# Allegro board DESIGN1 (1) (1).brd
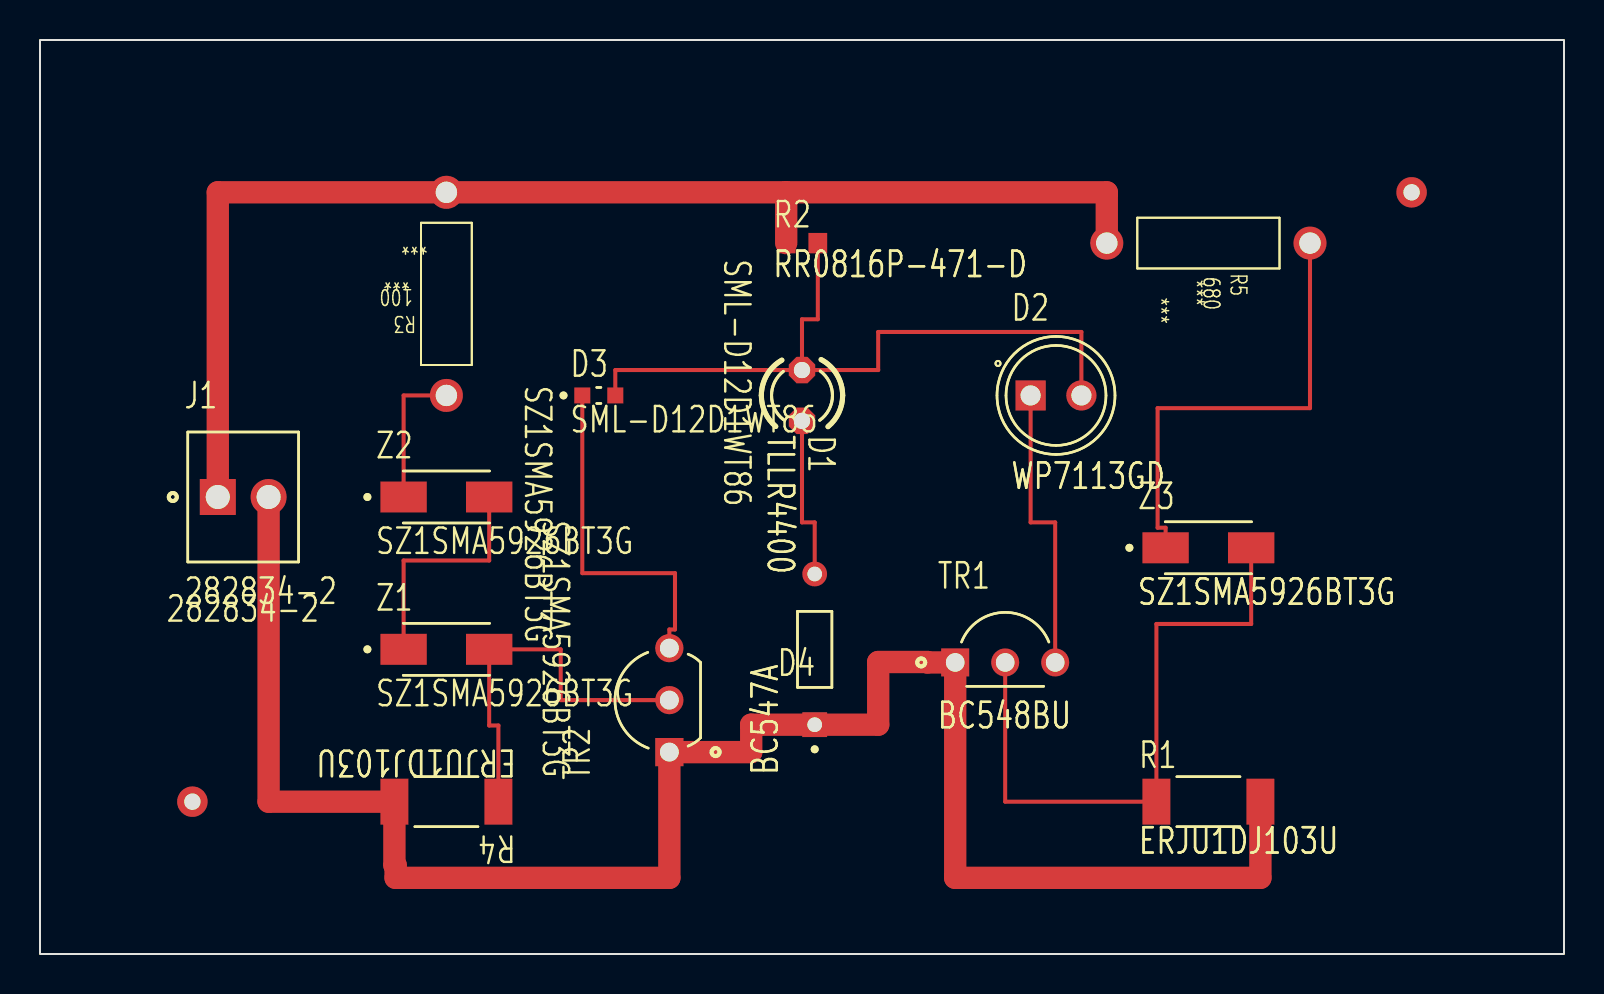
[diagram p0: board, top side]
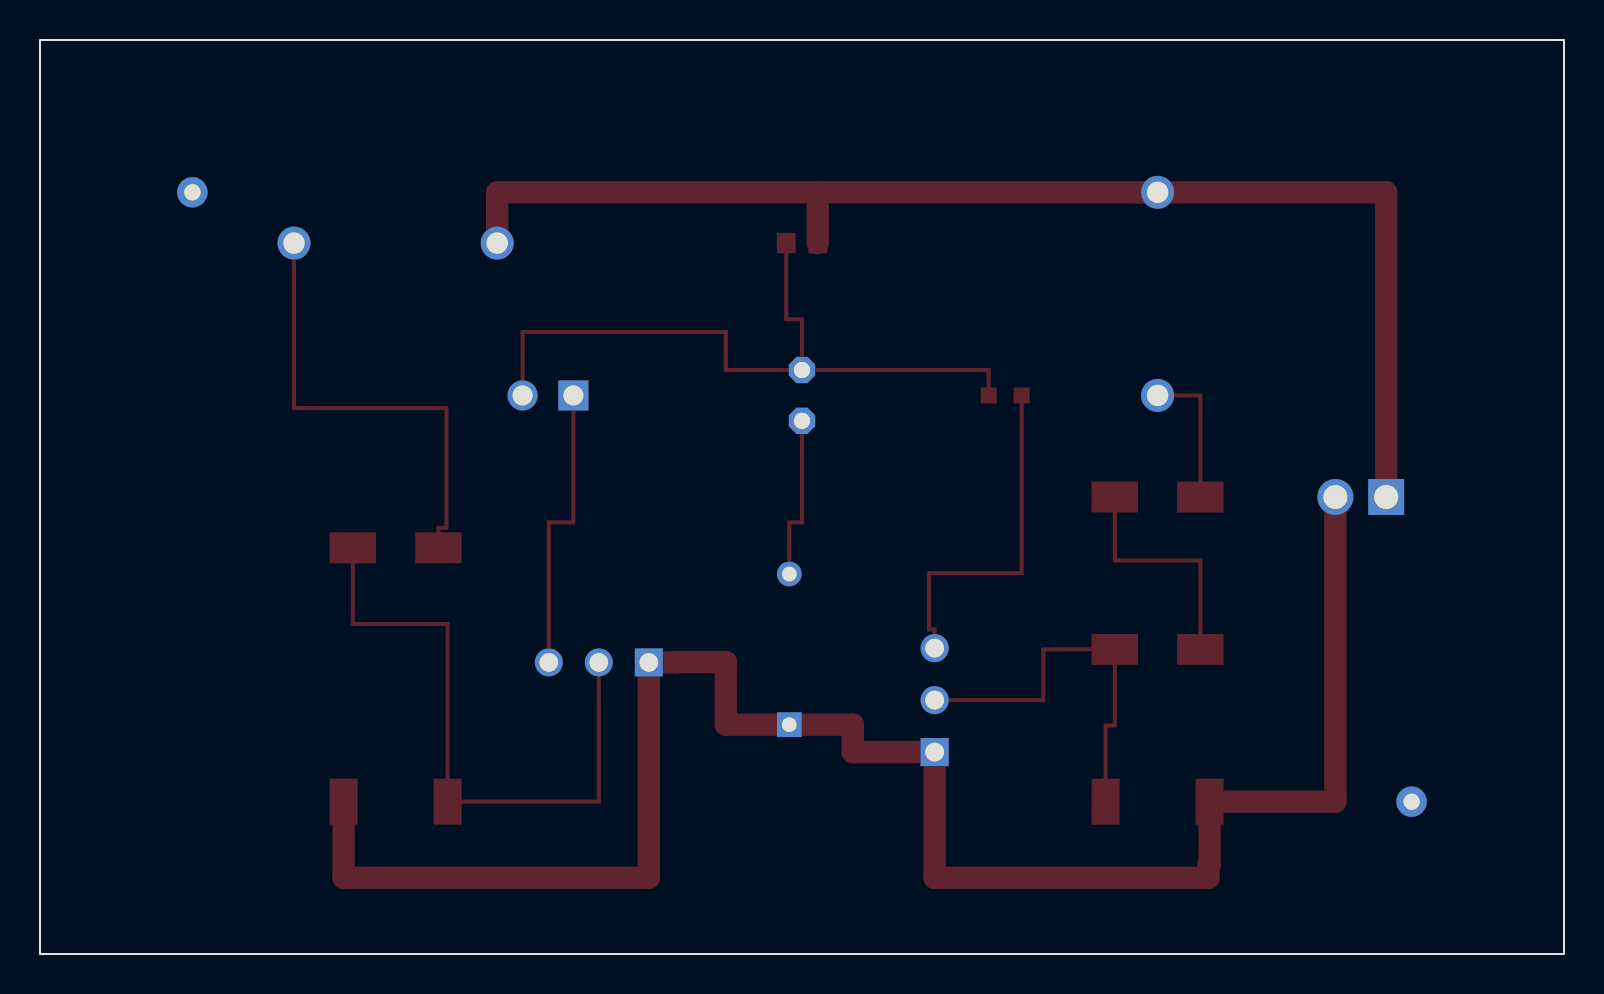
[diagram p1: board, bottom side, seen from below]

Outline 76.2 x 45.72 mm; copper layers: TOP, BOTTOM. Coordinates in mm from the lower left corner of the outline.
Outline path: rectangle 0,0 76.2,45.72

## Design rules (mm)
nets with their own width: min track width 0.203; nets N00389 N00469 N00542 N00555 N01168 N02381 N02623 N02869 N024491
nets with their own width: min track width 1.118; nets IESIRE VCC

## Placement (name value [footprint] x y rotation side)
D1  LED  [LED3MM]  38.1 27.94 270 top
D2  WP7113GD  [LED_WP7113GD]  50.8 27.94 0 top
D3  SML-D12D1WT86  [LED_SML-D12D1WT86]  27.94 27.94 0 top
D4  1N916A  [DIOAD753W49L380D172B]  38.74 15.24 90 top
J1  CON2  [TE_282834-2]  10.16 22.86 0 top
NOREF  -  [unnamed]  68.58 38.1 0 top
NOREF#2  -  [unnamed]  7.62 7.62 0 top
R1  10K  [RES_ERJU1DJ103U]  58.42 7.62 0 top
R2  470  [RESC1608X50N]  38.1 35.56 0 top
R3  100  [RES400]  20.32 38.1 180 top
R4  10K  [RES_ERJU1DJ103U]  20.32 7.62 180 top
R5  680  [RES400]  53.34 35.56 270 top
TR1  BC548  [TO92250P510H770-3]  48.26 15.24 0 top
TR2  BC547  [TO92260P520H877-3]  30.48 12.7 90 top
Z1  SZ1SMA5926BT3G  [DIOM5226X220N]  20.32 15.24 0 top
Z2  SZ1SMA5926BT3G  [DIOM5226X220N]  20.32 22.86 0 top
Z3  SZ1SMA5926BT3G  [DIOM5226X220N]  58.42 20.32 0 top

## Library data of the parts
D1 = LED
D2 = WP7113GD_0
D3 = SML-D12D1WT86
D4 = 1N916A
J1 = CON2
R1 R2 R4 = RESISTOR
R3 R5 = RESISTOR: Tolerance: ***; User Part Number: ***
TR1 = BC548
TR2 = BC547
Z1-Z3 = SZ1SMA5926BT3G

## Footprints (pads in the part's own frame, mm; a bottom-side part is the same pattern mirrored in y, then rotated)
DIOAD753W49L380D172B
  round 1.238 hole 0.73: A(3.769,0)
  rect 1.238x1.238 hole 0.73: K(-3.769,0)
DIOM5226X220N
  rect 2.32x1.55 smd: A(2.14,0) C(-2.14,0)
LED3MM
  rrect 1.321x1.321 hole 0.813: A(-1.27,0) K(1.27,0)
LED_SML-D12D1WT86
  rect 0.8x0.8 smd: A(0.825,0) C(-0.825,0)
LED_WP7113GD
  round 1.508 hole 1: A(1.27,0)
  rect 1.508x1.508 hole 1: C(-1.27,0)
RES400
  round 1.651 hole 1.067: 1(0,0) 2(0,10.16)
RES_ERJU1DJ103U
  rect 1.4x2.3 smd: 1(-2.6,0) 2(2.6,0)
RESC1608X50N
  rect 0.94x1.02 smd: 1(-0.79,0) 2(0.79,0)
TE_282834-2
  rect 1.8x1.8 hole 1.2: 1(-1.27,0)
  round 1.8 hole 1.2: 2(1.27,0)
TO92250P510H770-3
  rect 1.4x1.4 hole 0.93: 1(-2.5,-0.655)
  round 1.4 hole 0.93: 2(0,-0.655) 3(2.5,-0.655)
TO92260P520H877-3
  rect 1.41x1.41 hole 0.94: 1(-2.6,-0.988)
  round 1.41 hole 0.94: 2(0,-0.988) 3(2.6,-0.988)
unnamed
  round 1.524 hole 0.813: (0,0)

## Nets
VCC: J1.1 R2.1 R3.1 R5.1
IESIRE: D4.K J1.2 R1.2 R4.2 TR1.1(EMITTER) TR2.1(EMITTER)
N00389: R4.1 TR2.2 Z1.A
N00469: D1.A D2.A D3.A R2.2
N00542: R5.2 Z3.C
N00555: R1.1 TR1.2 Z3.A
N01168: Z1.C Z2.A
N02381: D1.K(C) D4.A
N02623: D3.C TR2.3
N02869: R3.2 Z2.C
N024491: D2.C TR1.3

## Routing (per net, layer and track width the routed paths; a pad name or vN(x,y) marks a point on that pad's centre or on a via; arc(x,y) is an arc through that point)
VCC: length 64.8
  TOP w1.118: 37.31,38.1 53.34,38.1 R5.1 ; 37.31,38.1 R2.1 ; 37.31,38.1 R3.1 8.89,38.1 J1.1
IESIRE: length 94
  TOP w1.118: R1.2 61.02,3.81 45.76,3.81 TR1.1 44.37,14.58 44.37,14.61 41.91,14.61 41.91,11.47 D4.K 35.56,11.47 35.56,10.1 TR2.1 31.47,3.81 17.78,3.81 17.78,4.45 17.72,4.45 R4.2 11.43,7.62 J1.2
N00389: length 19.6
  TOP w0.203: TR2.2 26.03,12.7 26.03,15.24 Z1.A 22.46,11.43 22.92,11.43 R4.1
N00469: length 36.8
  TOP w0.203: D1.A 38.1,31.75 38.89,31.75 R2.2 ; D1.A 41.91,29.21 41.91,31.12 52.07,31.12 D2.A ; D1.A 28.76,29.21 D3.A
N00542: length 23.3
  TOP w0.203: Z3.C 56.28,21.32 55.88,21.32 55.88,27.31 63.5,27.31 R5.2
N00555: length 32
  TOP w0.203: TR1.2 48.26,7.62 R1.1 55.82,16.51 60.56,16.51 Z3.A
N01168: length 11.9
  TOP w0.203: Z1.C 18.18,19.69 22.46,19.69 Z2.A
N02381: length 8.3
  TOP w0.203: D4.A 38.74,21.59 38.1,21.59 D1.K
N02623: length 17.6
  TOP w0.203: TR2.3 31.47,16.23 31.75,16.23 31.75,19.05 27.12,19.05 D3.C
N02869: length 7.2
  TOP w0.203: Z2.C 18.18,27.94 R3.2
N024491: length 14.6
  TOP w0.203: D2.C 49.53,21.59 50.76,21.59 TR1.3

## Text on the board
TOLERANCE_TOP: FIGURE | FINISHED_SIZE | 28.74 | 32.0 | 36.61 | 37.01 | 39.37 | 42.0 | 47.24 | DRILL CHART: TOP to BOTTOM | ALL UNITS ARE IN MILS | PLATED | QTY | 2 | 3 | 4 | 20 | TOTAL HOLES:
